# Altium PCB Stencil.PcbDoc (part 2 of 2)
Units mm, origin at the board's own origin, x right, y up, seen from the top; angles counter-clockwise.
Board outline 189.61 x 201.8 mm, 2 copper layers (Top Layer, Bottom Layer); 282 components, 0 nets, 889 pads, 215 vias.
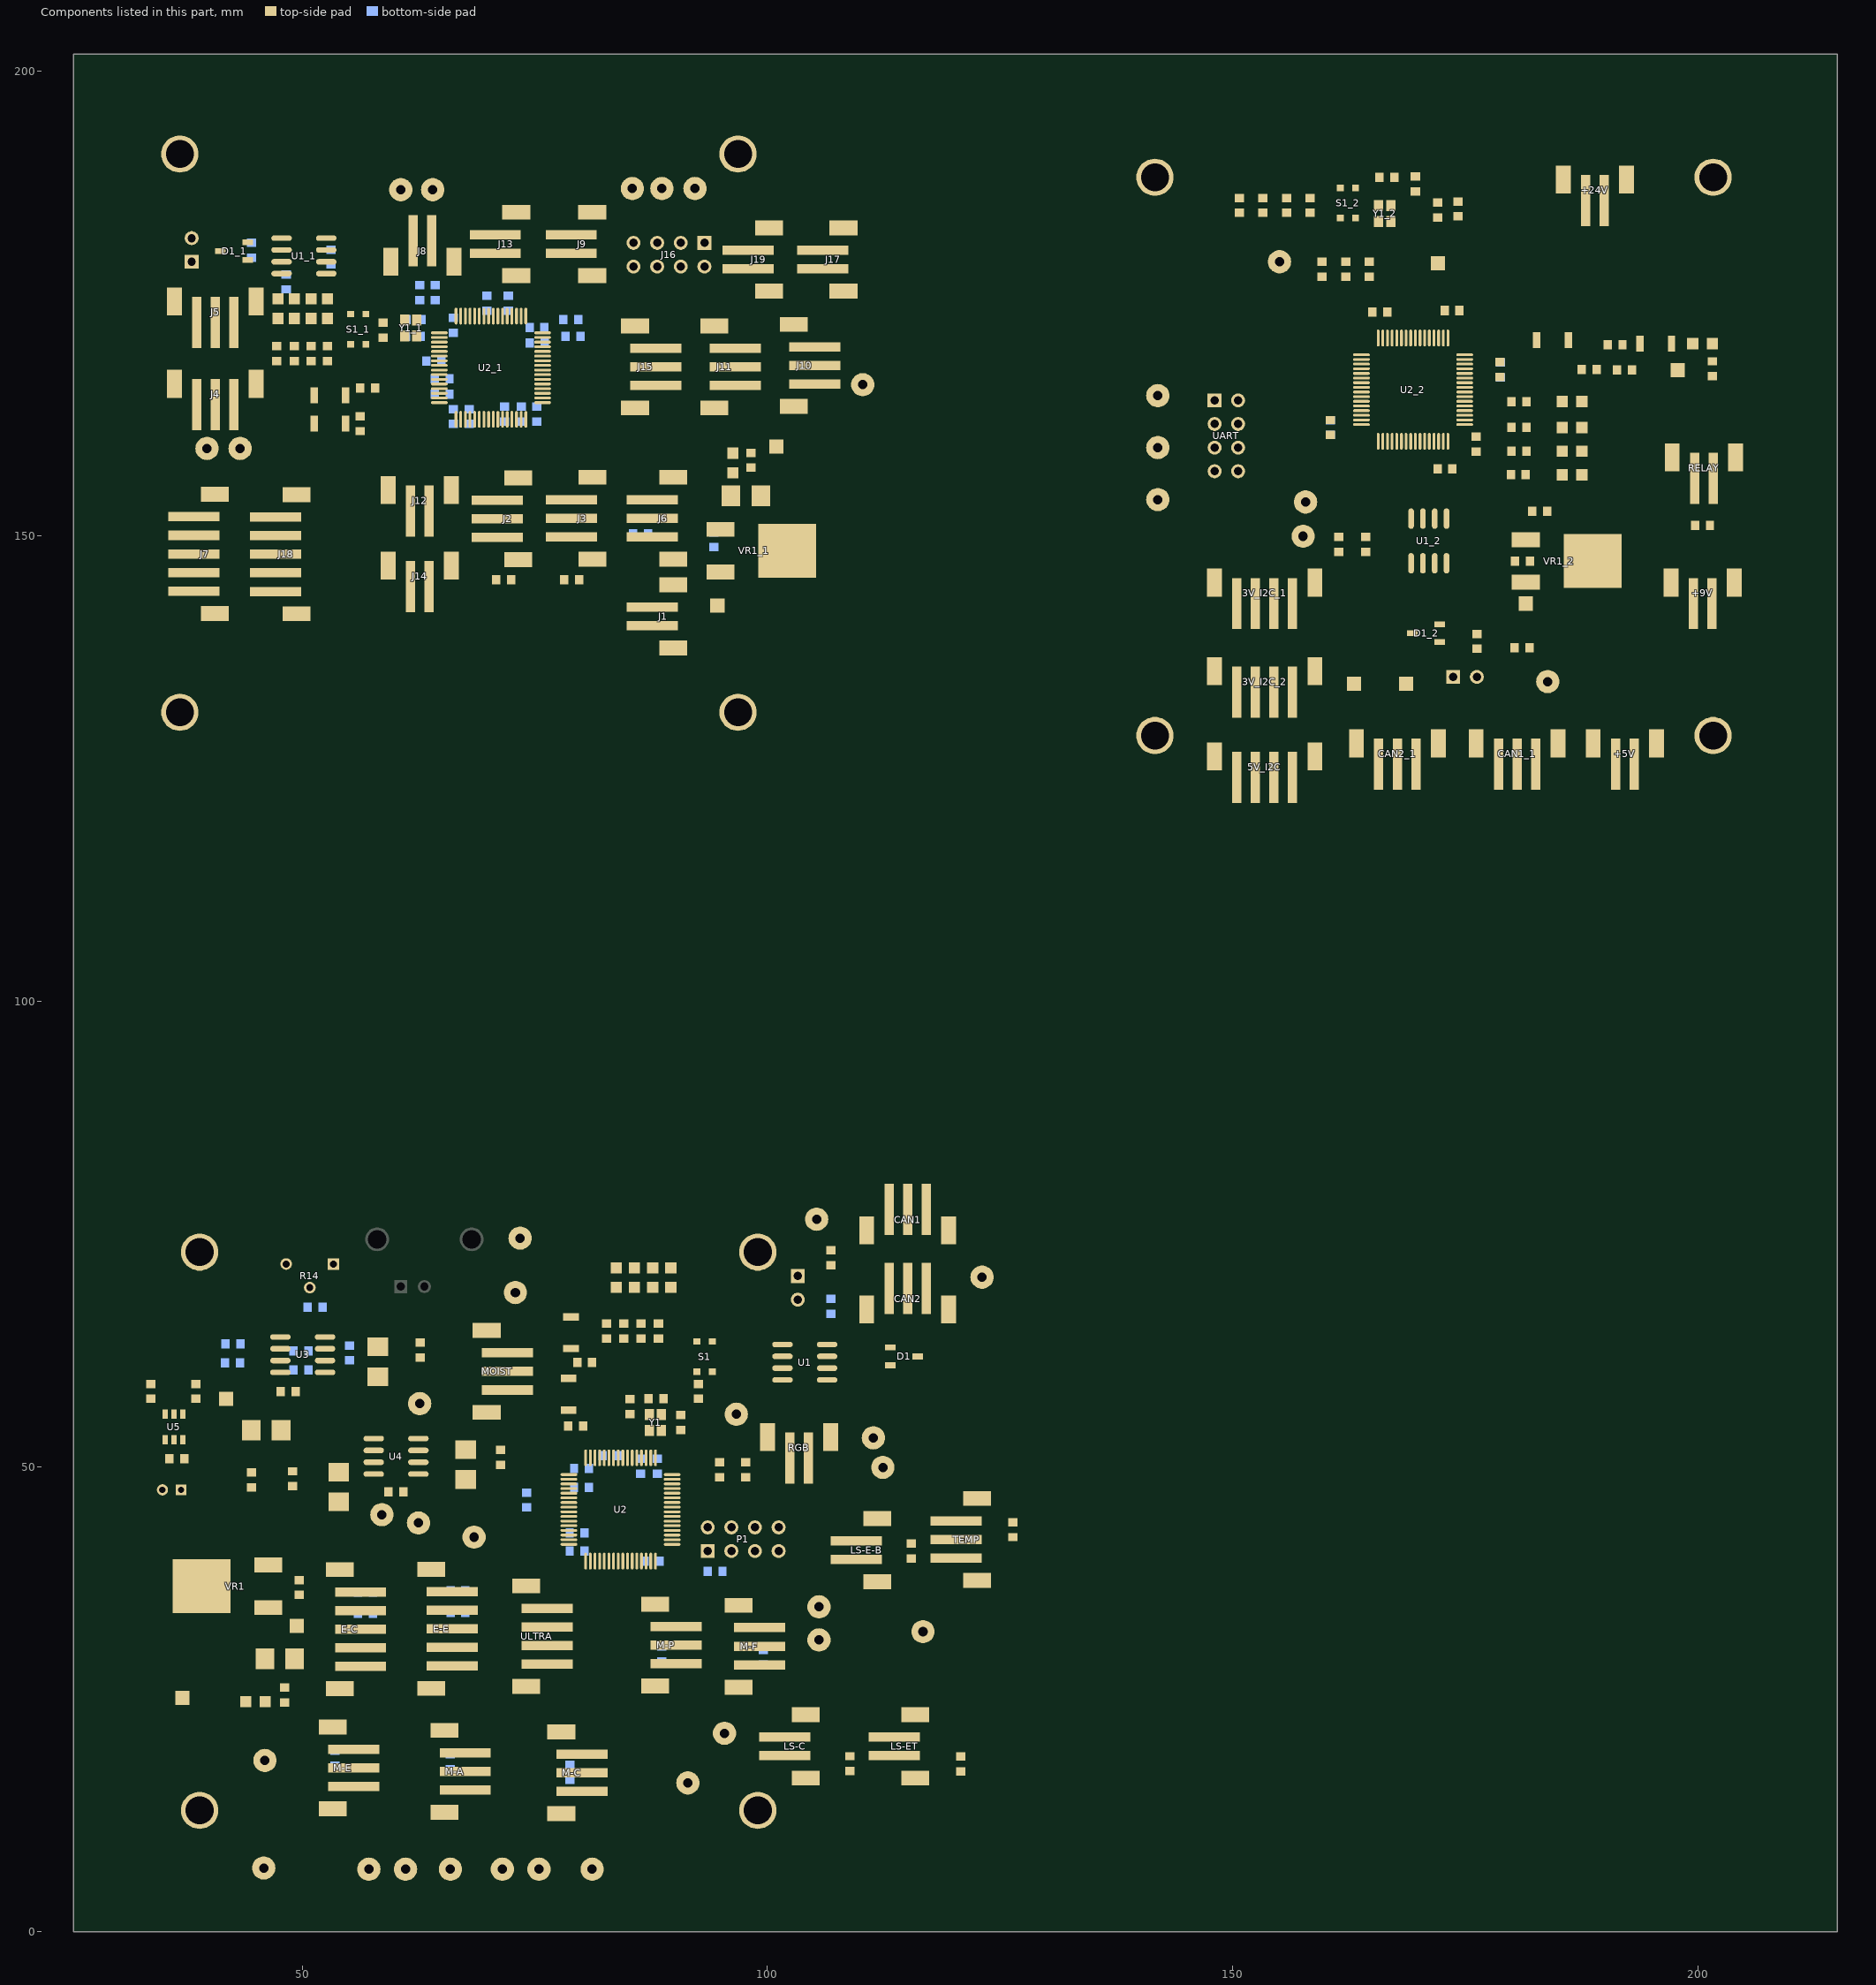
[diagram p2: the components of this part, seen from the top]

## Via types
v1: diameter 0.711, hole 0.406, Top Layer to Bottom Layer, 99 vias
v2: diameter 0.711, hole 0.406, Top Layer to Bottom Layer, tented both sides, 92 vias
v3: diameter 1.27, hole 0.711, Top Layer to Bottom Layer, 24 vias

## Nets (pads, with @x,y where several pads share a name; then routed paths per layer and width w, separated by ;. In a path a pad name is that pad's centre, name@x,y a point inside that pad or via, vN(x,y) a via of type N, cw(c..) or ccw(c..) an arc to the next point about the centre after c; other vN are vias at no path point)
pads on no net: 1.1 1.2 3V3.1 3V.1 3V_I2C_1.1 3V_I2C_1.2 3V_I2C_1.3 3V_I2C_1.4 3V_I2C_1.5 3V_I2C_1.6 3V_I2C_2.1 3V_I2C_2.2 3V_I2C_2.3 3V_I2C_2.4 3V_I2C_2.5 3V_I2C_2.6 5V.1 5V_I2C.1 5V_I2C.2 5V_I2C.3 5V_I2C.4 5V_I2C.5 5V_I2C.6 +5V.1 +5V.2 +5V.3 +5V.4 +9V.1 +9V.2 +9V.3 +9V.4 +24V.1 +24V.2 +24V.3 +24V.4 -5V.1 ?.0 C1.1 C1.2 C1_1.1 C1_1.2 C1_2.1 C1_2.2 C2.1 C2.2 C2_1.1 C2_1.2 C2_2.1 C2_2.2 C3.1 C3.2 C3_1.1 C3_1.2 C3_2.1 C3_2.2 C4.1 C4.2 C4_1.1 C4_1.2 C4_2.1 C4_2.2 C5.1 C5.2 C5_1.1 C5_1.2 C5_2.1 C5_2.2 C6.1 C6.2 C6_1.1 C6_1.2 C6_2.1 C6_2.2 C7.1 C7.2 C7_1.1 C7_1.2 C7_2.1 C7_2.2 C8.1 C8.2 C8_1.1 C8_1.2 C8_2.1 C8_2.2 C9.1 C9.2 C9_1.1 C9_1.2 C9_2.1 C9_2.2 C10.1 C10.2 C10_1.1 C10_1.2 C10_2.1 C10_2.2 C11.1 C11.2 C11_1.1 C11_1.2 C11_2.1 C11_2.2 C12.1 C12.2 C12_1.1 C12_1.2 C12_2.1 C12_2.2 C13.1 C13.2 C13_1.1 C13_1.2 C13_2.1 C13_2.2 C14.1 C14.2 C14_1.1 C14_1.2 C14_2.1 C14_2.2 C15.1 C15.2 C15_1.1 C15_1.2 C16.1 C16.2 C16_1.1 C16_1.2 C17.1 C17.2 C18.1 C18.2 C19.1 C19.2 C20.1 C20.2 C21.1 C21.2 C22.1 C22.2 C23.1 C23.2 C24.1 C24.2 C25.1 C25.2 C26.1 C26.2 C27.1 C27.2 CAN1.1 CAN1.2 CAN1.3 CAN1.4 CAN1.5 CAN1_1.1 CAN1_1.2 CAN1_1.3 CAN1_1.4 CAN1_1.5 CAN2.1 CAN2.2 CAN2.3 CAN2.4 CAN2.5 CAN2_1.1 CAN2_1.2 CAN2_1.3 CAN2_1.4 CAN2_1.5 CAN_H.1 CAN_L.1 CANH1.1 CANL1.1 D1.1 D1.2 D1.3 D1_1.1 D1_1.2 D1_1.3 D1_2.1 D1_2.2 D1_2.3 D2.1 D2.2 D2_1.1 D2_1.2 D2_2.1 D2_2.2 D3.1 D3.2 D3_1.1 D3_1.2 D3_2.1 D3_2.2 D4.1 D4.2 D4_1.1 D4_1.2 D4_2.1 D4_2.2 D5.1 D5.2 D5_1.1 D5_1.2 D5_2.1 D5_2.2 D6.1 D6.2 D6_1.1 D6_1.2 D6_2.1 D6_2.2 Designator16.0 Designator18.0 Designator19.0 E-C.1 E-C.2 E-C.3 E-C.4 E-C.5 E-C.6 E-C.7 E-E.1 E-E.2 E-E.3 E-E.4 E-E.5 E-E.6 E-E.7 EC1.1 EC2.1 ECI.1 EE1.1 EE2.1 EEI.1 GND.1 GND_1.1 H1.0 H2.0 H3.0 H4.0 I2C_SCL.1 I2C_SDA.1 J1.1 J1.2 J1.3 J1.4 J2.1 J2.2 J2.3 J2.4 J2.5 J3.1 J3.2 J3.3 J3.4 J3.5 J4.1 J4.2 J4.3 J4.4 J4.5 J5.1 J5.2 J5.3 J5.4 J5.5 J6.1 J6.2 J6.3 J6.4 J6.5 J7.1 J7.2 J7.3 J7.4 J7.5 J7.6 J7.7 J8.1 J8.2 J8.3 J8.4 J9.1 J9.2 J9.3 J9.4 J10.1 J10.2 J10.3 J10.4 J10.5 J11.1 J11.2 J11.3 J11.4 J11.5 J12.1 J12.2 J12.3 J12.4 J13.1 J13.2 J13.3 J13.4 J14.1 J14.2 J14.3 J14.4 J15.1 J15.2 J15.3 J15.4 J15.5 J16.1 J16.2 J16.3 J16.4 J16.5 J16.6 J16.7 J16.8 J17.1 J17.2 J17.3 J17.4 J18.1 J18.2 J18.3 J18.4 J18.5 J18.6 J18.7 J19.1 J19.2 J19.3 J19.4 J20.1 J20.2 JMP.1 JMP.2 LS-C.1 LS-C.2 LS-C.3 LS-C.4 LS-E-B.1 LS-E-B.2 LS-E-B.3 LS-E-B.4 LS-ET.1 LS-ET.2 LS-ET.3 LS-ET.4 M-A.1 M-A.2 M-A.3 M-A.4 M-A.5 M-C.1 M-C.2 M-C.3 M-C.4 M-C.5 M-E.1 M-E.2 M-E.3 M-E.4 M-E.5 M-F.1 M-F.2 M-F.3 M-F.4 M-F.5 M-P.1 M-P.2 M-P.3 M-P.4 M-P.5 MH1.0 MH2.0 MH3.0 MH4.0 MOIST-D.1 MOIST-P.1 MOIST.1 MOIST.2 MOIST.3 MOIST.4 MOIST.5 P1.1 P1.2 P1.3 P1.4 P1.5 P1.6 P1.7 P1.8 PH.1 POWER.1 POWER.2 PWMA.1 PWMC.1 PWME.1 PWMF.1 PWMP.1 R1.1 R1.2 R1_1.1 R1_1.2 R1_2.1 R1_2.2 R2.1 R2.2 R2_1.1 R2_1.2 R2_2.1 R2_2.2 R3.1 R3.2 R3_1.1 R3_1.2 R3_2.1 R3_2.2 R4.1 R4.2 R4_1.1 R4_1.2 R4_2.1 R4_2.2 R5.1 R5.2 R5_1.1 R5_1.2 R5_2.1 R5_2.2 R6.1 R6.2 R6_1.1 R6_1.2 R6_2.1 R6_2.2 R7.1 R7.2 R7_1.1 R7_1.2 R7_2.1 R7_2.2 R8.1 R8.2 R8_1.1 R8_1.2 R8_2.1 R8_2.2 R9.1 R9.2 R9_1.1 R9_1.2 R9_2.1 R9_2.2 R10.1 R10.2 R10_1.1 R10_1.2 R10_2.1 R10_2.2 R11.1 R11.2 R11_1.1 R11_1.2 R12.1 R12.2 R12_1.1 R12_1.2 R12_2.1 R12_2.2 R13.1 R13.2 R13_1.1 R13_1.2 R13_2.1 R13_2.2 R14.1 R14.2 R14.3 R14_1.1 R14_1.2 R14_2.1 R14_2.2 R15.1 R15.2 R15_1.1 R15_1.2 R15_2.1 R15_2.2 R16.1 R16.2 R16_1.1 R16_1.2 R16_2.1 R16_2.2 R17.1 R17.2 R17_1.1 R17_1.2 R18.1 R18.2 R19.1 R19.2 R19_1.1 R19_1.2 R20.1 R20.2 R20_1.1 R20_1.2 R21.1 R21.2 R21_1.1 R21_1.2 R22.1 R22.2 R22_1.1 R22_1.2 R23.1 R23.2 R23_1.1 R23_1.2 R24.1 R24.2 R24_1.1 R24_1.2 R25.1 R25.2 R26.1 R26.2 R27.1 R27.2 R28.1 R28.2 R29.1 R29.2 R30.1 R30.2 R31.1 R31.2 R32.1 R32.2 R33.1 R33.2 RELAY.1 RELAY.2 RELAY.3 RELAY.4 RGB.1 RGB.2 RGB.3 RGB.4 RT1.1 RT1.2 S1.1 S1.2 S1.3 S1.4 S1_1.1 S1_1.2 S1_1.3 S1_1.4 S1_2.1 S1_2.2 S1_2.3 S1_2.4 S2.1 S2.2 S2_1.1 S2_1.2 S2_2.1 S2_2.2 S3.1 S3.2 S3_1.1 S3_1.2 S3_2.1 S3_2.2 SCL.1 SDA.1 TEMP.1 TEMP.2 TEMP.3 TEMP.4 TEMP.5 TEMPT.1 THERM.1 TP1.1 TP2.1 TP3.1 TP4.1 TP5.1 TP6.1 TP7.1 TP8.1 TP9.1 TP10.1 U1.1 U1.2 U1.3 U1.4 U1.5 U1.6 U1.7 U1.8 U1_1.1 U1_1.2 U1_1.3 U1_1.4 U1_1.5 U1_1.6 U1_1.7 U1_1.8 U1_2.1 U1_2.2 U1_2.3 U1_2.4 U1_2.5 U1_2.6 U1_2.7 U1_2.8 U2.1 U2.2 U2.3 U2.4 U2.5 U2.6 U2.7 U2.8 U2.9 U2.10 U2.11 U2.12 U2.13 U2.14 U2.15 U2.16 U2.17 U2.18 U2.19 U2.20 U2.21 U2.22 U2.23 U2.24 U2.25 U2.26 U2.27 U2.28 U2.29 U2.30 U2.31 U2.32 U2.33 U2.34 U2.35 U2.36 U2.37 U2.38 U2.39 U2.40 U2.41 U2.42 U2.43 U2.44 U2.45 U2.46 U2.47 U2.48 U2.49 U2.50 U2.51 U2.52 U2.53 U2.54 U2.55 U2.56 U2.57 U2.58 U2.59 U2.60 U2.61 U2.62 U2.63 U2.64 U2_1.1 U2_1.2 U2_1.3 U2_1.4 U2_1.5 U2_1.6 U2_1.7 U2_1.8 U2_1.9 U2_1.10 U2_1.11 U2_1.12 U2_1.13 U2_1.14 U2_1.15 U2_1.16 U2_1.17 U2_1.18 U2_1.19 U2_1.20 U2_1.21 U2_1.22 U2_1.23 U2_1.24 U2_1.25 U2_1.26 U2_1.27 U2_1.28 U2_1.29 U2_1.30 U2_1.31 U2_1.32 U2_1.33 U2_1.34 U2_1.35 U2_1.36 U2_1.37 U2_1.38 U2_1.39 U2_1.40 U2_1.41 U2_1.42 U2_1.43 U2_1.44 U2_1.45 U2_1.46 U2_1.47 U2_1.48 U2_1.49 U2_1.50 U2_1.51 U2_1.52 U2_1.53 U2_1.54 U2_1.55 U2_1.56 U2_1.57 U2_1.58 U2_1.59 U2_1.60 U2_1.61 U2_1.62 U2_1.63 U2_1.64 U2_2.1 U2_2.2 U2_2.3 U2_2.4 U2_2.5 U2_2.6 U2_2.7 U2_2.8 U2_2.9 U2_2.10 U2_2.11 U2_2.12 U2_2.13 U2_2.14 U2_2.15 U2_2.16 U2_2.17 U2_2.18 U2_2.19 U2_2.20 U2_2.21 U2_2.22 U2_2.23 U2_2.24 U2_2.25 U2_2.26 U2_2.27 U2_2.28 U2_2.29 U2_2.30 U2_2.31 U2_2.32 U2_2.33 U2_2.34 U2_2.35 U2_2.36 U2_2.37 U2_2.38 U2_2.39 U2_2.40 U2_2.41 U2_2.42 U2_2.43 U2_2.44 U2_2.45 U2_2.46 U2_2.47 U2_2.48 U2_2.49 U2_2.50 U2_2.51 U2_2.52 U2_2.53 U2_2.54 U2_2.55 U2_2.56 U2_2.57 U2_2.58 U2_2.59 U2_2.60 U2_2.61 U2_2.62 U2_2.63 U2_2.64 U3.1 U3.2 U3.3 U3.4 U3.5 U3.6 U3.7 U3.8 U4.1 U4.2 U4.3 U4.4 U4.5 U4.6 U4.7 U4.8 U5.1 U5.2 U5.3 U5.4 U5.5 U5.6 U_RTS.1 U_RX.1 U_TX.1 UART.1 UART.2 UART.3 UART.4 UART.5 UART.6 UART.7 UART.8 UART_R.1 UART_RTS.1 UART_U.1 UE.1 ULTRA.1 ULTRA.2 ULTRA.3 ULTRA.4 ULTRA.5 ULTRA.6 UT.1 V_MNTR.1 VR1.1 VR1.2 VR1.3 VR1_1.1 VR1_1.2 VR1_1.3 VR1_2.1 VR1_2.3 VR1_2.4 Y1.1 Y1.2 Y1.3 Y1.4 Y1_1.1 Y1_1.2 Y1_1.3 Y1_1.4 Y1_2.1 Y1_2.2 Y1_2.3 Y1_2.4
copper on no net: | length 4796.4
  Top Layer w0.254: 35.714,50.849 35.714,51.573 36.133,51.992 36.133,52.925 ; 37.083,52.925 37.083,51.766 37.314,51.535 37.314,50.849 ; 38.1,179.483 38.1,177.578 40.64,175.038 40.64,172.955 ; 38.354,148.082 40.513,148.082 41.434,149.003 41.434,150.421 50.177,159.163 58.143,159.163 58.727,159.747 68.941,159.747 70.499,161.305 70.499,162.503 ; 38.354,150.082 40.449,150.082 50.038,159.671 57.924,159.671 58.457,160.204 68.752,160.204 69.999,161.452 69.999,162.503 ; 38.354,152.082 41.687,152.082 49.784,160.179 57.785,160.179 58.267,160.661 68.562,160.661 69.499,161.598 69.499,162.527 69.519,162.547 ; 40.64,159.29 40.64,164.116 40.64,172.955 ; v1(42.179,24.736) 43.908,24.736 ; 42.64,159.068 42.64,160.084 ; 43.307,159.417 42.64,160.084 ; v3@45.277,60.374 46.293,61.39 47.576,61.39 ; 45.72,7.112 45.72,13.794 v1(51.611,19.685) 51.683,19.613 55.507,19.613 ; 46.008,24.736 48.034,24.736 48.109,24.661 ; 46.351,34.848 49.478,34.848 v1(49.53,34.796) ; 46.351,39.418 47.193,39.418 48.805,37.806 49.657,37.806 ; 47.117,150.051 50.324,150.051 59.105,158.832 69.32,158.832 71.499,161.012 71.499,162.527 71.519,162.547 ; 47.117,152.051 51.677,152.051 58.916,159.29 69.13,159.29 70.999,161.158 70.999,162.527 71.019,162.547 ; 47.244,168.811 49.208,166.847 64.719,166.847 ; 47.244,170.411 47.244,173.26 47.371,173.387 ; 47.715,53.897 52.529,53.897 v3(53.85,52.576) 54.599,52.576 56.707,50.468 57.609,50.468 ; 47.765,178.213 v2(49.403,178.213) ; 47.765,179.483 47.572,179.676 v2(45.974,179.676) 44.147,179.676 42.64,178.169 42.64,172.955 42.64,164.116 42.64,160.084 ; 47.765,180.753 45.212,180.753 44.389,181.576 44.147,181.576 43.876,181.576 40.894,178.594 40.894,173.209 40.64,172.955 ; 48.998,58.088 50.611,58.088 56.961,51.738 57.671,51.738 58.674,51.738 59.487,50.925 59.487,47.039 ; 49.149,32.766 49.53,33.147 v1(49.53,34.796) ; 49.149,168.811 50.613,167.347 64.719,167.347 ; 49.149,170.411 49.149,173.387 ; 49.174,29.337 50.038,28.473 v1(50.038,26.543) ; 49.512,148.096 59.791,158.375 69.509,158.375 71.999,160.865 71.999,162.527 72.019,162.547 ; 49.657,36.206 49.657,34.923 v1(49.53,34.796) ; v2(50.84,180.753) 52.565,180.753 ; 50.927,168.811 51.891,167.847 64.719,167.847 ; 50.927,170.411 50.927,173.387 ; v1(51.76,15.613) 55.507,15.613 ; 52.438,61.39 54.167,61.39 55.056,60.501 v1(55.056,59.358) ; 52.565,178.213 55.291,175.487 66.821,175.487 67.499,174.809 67.499,173.647 67.519,173.647 ; 52.565,179.483 52.603,179.445 ; 52.565,182.023 53.975,182.023 59.846,176.152 66.802,176.152 67.999,174.955 67.999,173.667 68.019,173.647 ; 52.705,168.811 53.169,168.347 64.719,168.347 ; 52.705,170.411 52.705,173.387 ; 54.659,162.084 54.659,162.641 54.994,162.306 55.619,162.306 56.127,162.814 56.483,162.814 58.276,164.607 63.311,164.607 63.551,164.847 64.719,164.847 ; 54.659,165.132 54.659,165.622 55.951,165.622 56.223,165.894 57.053,165.064 63.051,165.064 63.334,165.347 64.719,165.347 ; 55.264,170.701 57.118,168.847 64.719,168.847 64.739,168.867 66.092,168.867 v2(66.167,168.942) ; 55.507,17.613 57.872,17.613 65.151,24.892 79.467,24.892 81.451,26.876 81.451,39.838 ; 56.007,36.656 56.007,42.672 58.039,44.704 58.293,44.704 ; 56.261,28.529 59.771,28.529 v1@59.817,28.575 ; 56.261,32.529 60.175,32.529 61.595,33.949 61.595,39.373 67.36,45.138 75.567,45.138 75.642,45.212 77.774,45.212 77.849,45.138 78.651,45.138 ; 56.261,34.529 60.027,34.529 60.921,35.422 60.921,42.607 63.983,45.669 78.619,45.669 78.651,45.638 ; 56.261,161.195 58.547,163.481 v2(64.643,163.481) ; 56.388,19.812 56.388,22.655 61.419,27.686 79.883,27.686 80.951,28.754 80.951,39.838 ; 56.832,173.869 57.08,174.117 v2(57.785,174.117) ; 57.823,165.894 57.87,165.847 64.719,165.847 65.861,165.847 66.83,164.878 v2(68.072,164.878) ; 57.912,36.529 v1@60.069,36.529 ; 58.104,60.133 58.356,59.88 59.436,60.96 v3(60.706,60.96) 61.904,60.96 62.676,61.733 ; 58.547,44.831 59.88,46.164 64.008,46.164 ; 58.674,171.317 60.644,169.347 64.719,169.347 ; 58.674,172.917 58.89,173.133 v2(59.944,173.133) 60.918,173.133 60.996,173.211 ; v2(59.944,171.482) 59.973,171.511 60.996,171.511 ; 60.579,187.23 61.894,185.915 61.894,181.733 ; 61.849,181.55 v2(61.849,178.213) 63.373,176.689 66.917,176.689 68.999,174.607 68.999,173.667 69.019,173.647 ; 62.23,56.642 60.871,55.283 60.871,47.293 61.542,46.622 64.389,46.622 ; 62.357,171.228 63.119,170.466 v2(63.119,170.212) 63.212,170.212 63.557,169.867 64.707,169.867 64.719,169.855 ; 62.471,50.468 63.578,50.468 64.389,49.657 64.389,46.622 ; v1@62.738,28.448 62.85,28.56 66.091,28.56 ; 63.373,146.209 63.627,146.463 63.627,148.495 67.157,152.025 67.157,153.778 67.862,154.482 67.862,154.5 72.804,159.442 72.822,159.442 73.254,159.874 73.254,159.892 73.569,160.207 v2(74.676,160.207) ; 63.627,152.686 63.627,155.988 65.557,157.918 70.256,157.918 v2(72.517,160.179) 72.517,161.116 72.999,161.598 72.999,162.527 73.019,162.547 ; v1(63.881,15.24) 63.883,15.242 67.509,15.242 ; v1@63.881,17.145 63.978,17.242 67.509,17.242 71.979,17.242 74.549,19.812 74.549,22.705 75.692,23.848 79.717,23.848 82.451,26.583 82.451,39.838 ; 63.881,46.138 78.651,46.138 ; 64.008,187.23 64.008,181.847 63.894,181.733 64.135,181.492 v2(64.135,178.213) 65.151,177.197 67.111,177.197 69.499,174.809 69.499,173.667 69.519,173.647 ; 64.389,46.609 64.389,46.622 ; 65.025,166.366 v2(67.111,166.366) ; 65.405,6.985 63.017,9.373 63.017,18.44 63.627,19.05 v1(63.881,19.05) 64.073,19.242 67.509,19.242 67.509,22.297 69.469,24.257 74.93,24.257 74.979,24.306 79.527,24.306 81.951,26.729 81.951,39.838 ; v2(65.786,161.571) 66.04,161.317 66.718,161.317 66.999,161.598 66.999,162.527 67.019,162.547 ; 66.091,32.56 70.23,32.56 71.247,33.577 71.247,39.268 75.616,43.638 78.651,43.638 ; 66.091,34.56 69.777,34.56 v1(69.81,34.593) 70.656,35.438 70.656,39.324 75.47,44.138 78.651,44.138 ; 66.519,173.647 65.157,173.647 v2(64.897,173.387) 64.719,173.209 64.719,171.847 64.719,171.827 65.668,171.827 68.072,169.423 v2(68.072,164.878) ; 67.019,173.647 67.019,172.281 v2(67.437,171.863) ; 67.502,48.614 68.061,48.055 v3(71.312,48.055) 71.312,50.176 ; 67.519,162.547 67.539,162.567 67.539,163.496 68.072,164.029 v2(68.072,164.878) ; 68.199,42.418 66.091,40.31 66.091,36.56 69.821,36.56 v1(69.85,36.531) 69.85,41.529 72.947,44.626 77.923,44.626 ; 69.723,60.325 67.056,62.992 67.056,67.945 73.279,74.168 ; 70.499,173.667 70.519,173.647 ; 70.499,173.895 70.499,175.104 69.85,175.754 v2(69.85,177.07) 70.231,177.451 70.231,179.896 70.739,180.404 ; 70.828,145.32 70.828,150.082 ; 70.942,149.863 71.167,149.638 73.152,149.638 75.863,152.349 75.863,158.953 77.47,160.56 77.47,164.338 76.981,164.827 76.287,164.827 76.327,164.867 ; 70.942,151.863 73.132,151.863 75.405,154.136 75.405,159.895 75.413,159.902 75.413,163.324 74.422,164.315 74.422,165.126 74.623,165.327 75.819,165.327 75.819,165.347 ; v2(70.993,175.8) 70.999,175.794 70.999,174.149 ; 71.519,173.647 71.539,173.667 71.539,174.809 73.604,176.874 76.893,176.874 79.248,179.229 83.312,179.229 85.598,181.515 85.598,187.23 85.471,187.357 ; v1@72.009,32.893 72.009,39.384 75.763,43.138 78.651,43.138 ; 72.06,60.224 74.318,60.224 75.184,59.358 75.184,47.672 75.727,47.13 77.851,47.13 ; v1(72.136,32.893) 73.787,32.893 ; 72.519,173.647 72.539,173.647 72.539,174.809 74.147,176.417 84.639,176.417 86.868,178.646 86.868,180.245 88.138,181.515 88.138,186.849 88.646,187.357 ; v1@72.771,28.829 72.834,28.766 76.327,28.766 ; 72.771,68.199 72.06,67.488 72.06,62.224 72.066,62.218 75.438,62.218 75.692,61.964 75.692,47.883 75.937,47.638 78.651,47.638 ; 73.039,174.022 73.039,174.596 73.32,174.877 74.218,174.877 74.991,174.104 80.937,174.104 81.915,175.082 85.844,175.082 89.269,178.507 89.269,180.106 90.678,181.515 90.678,185.833 92.202,187.357 ; v2(73.279,171.101) 73.525,171.347 75.819,171.347 ; 73.519,162.547 73.519,161.177 v2(73.66,161.036) ; v2(73.616,165.132) 73.616,164.232 74.019,163.829 74.019,162.547 ; 73.66,58.039 73.787,57.912 v1(73.787,56.515) ; 74.019,173.647 81.159,173.647 82.137,174.625 86.328,174.625 90.678,178.975 ; 75.164,164.827 75.184,164.847 75.819,164.847 75.819,164.827 ; v2(75.438,174.879) 81.066,174.879 81.726,175.539 81.908,175.539 81.915,175.546 84.709,175.546 88.138,178.975 ; v2(75.565,179.991) 78.789,179.991 78.903,180.105 ; 75.799,166.867 75.819,166.847 ; 75.819,6.985 73.787,9.017 73.787,16.637 v1(76.2,19.05) 76.236,19.086 80.082,19.086 80.082,23.567 82.951,26.436 82.951,39.838 ; 75.819,164.347 76.022,164.144 76.022,162.732 v2(76.454,162.3) ; 75.819,167.347 77.188,167.347 84.328,160.207 84.328,152.94 85.344,151.924 87.63,151.924 ; 75.819,167.847 75.839,167.867 82.228,167.867 85.09,165.005 99.441,165.005 102.783,168.347 105.08,168.347 ; 75.819,168.847 75.839,168.827 82.03,168.827 83.693,167.164 93.186,167.164 94.202,168.18 96.52,168.18 ; 75.819,169.347 84.558,169.347 85.725,168.18 88.011,168.18 ; 75.819,169.847 75.839,169.867 79.436,169.867 80.797,171.228 v2(81.369,171.228) 87.76,171.228 94.11,177.578 102.743,177.578 103.672,178.507 105.918,178.507 ; 75.819,170.347 75.839,170.367 79.289,170.367 81.928,173.006 v2(82.423,173.006) 83.127,173.71 89.588,173.71 94.615,178.737 97.917,178.737 ; 75.819,170.847 75.839,170.867 79.143,170.867 82.443,174.167 88.41,174.167 93.218,178.975 ; 75.819,171.847 76.438,171.847 v2(77.089,172.498) ; 75.946,166.367 75.986,166.327 ; 75.986,165.867 75.986,165.827 76.768,165.827 82.423,160.172 v2(82.423,158.02) ; 76.073,166.367 76.875,166.367 83.414,159.828 83.414,154.134 81.204,151.924 78.943,151.924 ; 76.295,30.734 76.327,30.766 79.851,30.766 v1(79.883,30.734) 79.883,42.227 79.472,42.638 78.651,42.638 ; 76.327,166.867 77.021,166.867 83.871,160.017 83.871,151.238 85.185,149.924 87.63,149.924 ; v1@76.454,14.986 76.554,15.086 80.082,15.086 ; v1(76.708,48.387) 76.835,48.514 77.211,48.138 78.651,48.138 ; v1@76.962,40.181 76.962,40.658 77.942,41.638 78.651,41.638 ; v1(76.962,41.705) 77.362,41.705 77.753,42.095 78.608,42.095 78.651,42.138 ; v1@77.343,49.911 77.343,49.022 77.727,48.638 78.651,48.638 ; 78.143,145.32 78.943,146.12 78.943,149.924 79.165,150.146 v2(82.423,150.146) ; 78.613,56.085 78.613,57.531 v1@78.74,57.658 ; 78.613,59.485 79.072,59.485 80.137,58.42 80.137,54.394 80.175,54.356 ; 78.651,46.638 78.635,46.622 64.389,46.622 ; 78.867,62.689 v1@78.867,64.389 ; 79.121,66.167 81.407,63.881 81.407,51.128 81.408,51.127 81.408,50.98 81.451,50.938 ; 80.082,17.086 82.364,17.086 83.439,18.161 83.439,26.289 ; 80.137,54.229 80.01,54.102 80.01,52.937 80.855,52.092 80.855,51.034 80.951,50.938 ; 81.951,50.938 81.951,48.986 v1(82.042,48.895) ; 82.451,50.938 82.451,49.756 v1@83.185,49.022 ; 82.689,63.768 82.042,63.121 82.042,53.352 82.408,52.985 82.408,52.974 82.908,52.474 82.908,50.696 82.931,50.673 ; 82.689,65.368 83.745,66.424 83.745,69.265 ; 83.439,50.927 83.439,52.601 82.55,53.49 82.55,61.766 84.552,63.768 ; 83.451,25.949 83.451,39.838 ; v1(83.693,73.66) 83.745,73.608 83.745,71.365 ; 83.947,51.054 83.896,51.105 83.896,52.791 83.058,53.629 83.058,60.411 86.414,63.768 ; 83.951,39.838 83.951,31.744 86.485,29.21 v1(86.487,29.21) 90.049,29.21 90.162,29.097 ; 84.43,51.689 84.43,52.93 83.566,53.794 83.566,59.057 88.277,63.768 ; 84.451,39.838 84.494,39.795 84.494,31.965 86.512,29.947 92.641,29.947 93.472,29.115 93.472,20.066 94.615,18.923 101.854,18.923 108.712,18.923 108.839,19.05 ; 84.552,65.368 85.725,66.541 85.725,69.241 85.7,69.265 ; 84.951,39.838 84.963,39.826 84.963,33.502 86.588,31.877 92.71,31.877 92.964,31.623 101.981,31.623 102.489,31.115 102.489,29.464 101.46,28.435 99.151,28.435 ; 84.951,50.938 84.951,51.743 84.963,51.755 84.963,53.303 84.074,54.192 84.074,57.658 85.471,59.055 92.416,59.055 ; 84.963,55.599 84.963,53.949 85.451,53.461 85.451,51.89 85.451,51.794 ; 84.963,57.199 85.052,57.288 87.211,57.288 87.211,55.684 87.298,55.597 ; v1@85.598,73.66 85.7,73.558 85.7,71.365 ; 85.951,39.838 85.951,37.481 86.882,36.551 99.314,36.551 103.505,32.36 103.505,26.797 111.125,19.177 ; 85.959,50.938 85.959,52.275 86.26,52.576 88.174,52.576 88.626,53.028 88.626,54.063 ; v1(86.106,54.102) 86.995,54.102 87.249,53.848 87.376,53.975 ; 86.414,65.368 87.656,66.609 87.656,69.265 ; 86.451,39.838 86.451,37.628 87.071,37.008 104.064,37.008 107.188,40.132 115.189,40.132 ; v1(86.741,41.529) 86.835,41.529 87.451,40.913 87.451,39.838 ; v1@86.792,33.077 86.812,33.097 90.162,33.097 ; 86.951,39.838 86.951,38.525 v1@87.503,37.973 ; v1@87.376,47.117 88.897,48.638 89.751,48.638 ; v1@87.503,73.66 v1(87.63,73.533) 87.656,73.507 87.656,71.365 ; 87.629,54.024 87.676,54.07 ; 87.951,39.838 v1(89.742,39.838) ; 88.277,65.368 89.611,66.702 89.611,69.265 ; 88.811,57.288 v1(90.797,57.288) ; 88.976,53.883 88.976,54.07 90.671,54.07 90.771,54.17 ; 89.611,71.365 89.611,73.482 v1(89.662,73.533) ; 89.751,41.638 89.769,41.656 90.551,41.656 92.414,39.793 99.121,39.793 99.949,40.622 99.949,41.656 98.652,42.953 98.652,43.464 ; 89.751,42.138 88.334,42.138 88.011,41.815 88.011,41.361 88.715,40.658 90.903,40.658 93.587,37.973 100.33,37.973 103.378,41.021 116.713,41.021 116.776,40.957 ; 89.751,42.638 91.601,42.638 92.184,42.055 94.981,42.055 96.112,40.924 ; 89.751,43.138 91.646,43.138 93.104,44.595 94.041,44.595 94.703,43.933 94.703,43.077 95.725,42.055 96.581,42.055 97.712,40.924 98.652,40.924 ; 89.751,44.138 91.999,44.138 92.914,45.052 98.663,45.052 100.061,43.655 100.061,42.19 101.092,41.16 ; 89.751,46.138 94.779,46.138 97.282,48.641 ; 89.751,46.638 92.612,46.638 94.488,48.514 ; 89.751,47.638 91.707,47.638 93.091,49.022 93.091,54.994 97.533,59.436 100.838,59.436 ; 89.751,48.138 89.794,48.095 91.059,48.095 92.456,49.492 92.456,55.372 100.203,63.119 101.181,63.119 ; 89.751,49.138 89.751,50.508 v1(90.043,50.8) ; 90.671,55.547 90.797,55.673 v1(90.797,57.288) ; 91.44,16.002 91.44,28.829 ; 92.402,60.193 92.402,59.069 92.416,59.055 ; 92.456,60.198 95.956,63.698 102.799,63.698 104.14,62.357 104.14,59.309 105.664,57.785 105.664,46.863 102.265,43.464 101.192,43.464 ; 92.583,57.288 v1(90.797,57.288) ; 92.583,58.888 92.416,59.055 ; 94.052,63.443 94.052,64.433 v1@94.056,64.438 ; 94.488,49.149 93.726,49.911 93.726,53.213 96.139,55.626 96.647,55.626 ; 94.869,48.857 95.669,49.657 102.362,49.657 ; 95.377,21.336 94.615,22.098 94.615,28.067 v1@95.377,28.829 ; v1(95.504,32.639) 95.554,32.689 99.151,32.689 ; v1(95.631,28.702) 95.644,28.689 99.151,28.689 ; 96.076,154.337 96.266,154.527 ; 96.302,158.947 98.203,158.947 ; 98.044,48.641 99.314,47.371 103.124,47.371 104.394,48.641 104.394,50.927 ; v1(98.298,21.082) 100.33,21.082 100.457,20.955 ; v1(99.187,60.833) 99.568,60.833 100.711,61.976 ; 101.092,40.767 101.092,41.16 ; 101.192,40.924 101.192,41.059 101.092,41.16 ; 103.251,67.691 103.886,67.691 106.807,70.612 106.807,71.628 ; 103.251,70.485 102.362,71.374 102.362,76.581 106.68,80.899 114.554,80.899 115.062,80.391 115.062,80.137 ; 104.902,76.581 104.965,76.644 ; v1(105.918,41.91) 109.22,41.91 109.347,42.037 ; v1@106.807,65.024 106.831,65 106.831,63.119 ; 106.807,73.228 106.807,74.803 104.965,76.644 ; 106.958,60.452 106.831,60.579 112.522,60.579 112.776,60.833 ; 107.188,61.722 111.887,61.722 112.964,62.799 113.206,62.799 ; 111.887,49.784 109.601,49.784 101.092,41.275 101.092,41.16 ; 112.903,77.978 106.299,77.978 104.965,76.644 ; 112.935,69.647 112.935,63.087 113.284,62.738 ; 113.062,69.139 113.062,77.648 ; 113.206,60.899 113.477,60.899 114.935,62.357 114.935,67.564 ; 113.614,18.923 120.777,18.923 120.904,18.796 ; 113.614,20.939 117.332,20.939 v1@117.316,20.955 ; 114.935,68.453 115.062,68.58 115.062,69.139 115.062,72.39 ; 115.062,77.648 115.062,72.39 ; 116.156,61.849 v1(117.856,61.849) ; 116.84,32.385 116.84,40.894 116.776,40.957 ; 117.062,69.139 117.062,70.707 117.094,70.739 v1(118.745,70.739) ; 117.062,77.648 117.062,79.343 117.094,79.375 v1(118.999,79.375) ; 120.009,40.048 123.487,40.048 123.489,40.051 ; 120.269,42.164 117.983,42.164 116.776,40.957 ; 122.174,42.418 126.365,42.418 ; 123.063,70.358 121.031,72.39 115.062,72.39 ; 141.958,153.924 143.736,153.924 146.784,156.972 148.054,156.972 148.054,155.575 149.197,154.432 153.642,154.432 156.817,157.607 167.358,157.607 168.14,158.389 168.14,160.185 ; 141.958,158.496 141.958,159.004 ; 141.958,159.512 148.054,159.512 149.197,158.369 149.197,155.575 149.578,155.194 153.515,155.194 156.436,158.115 166.45,158.115 167.131,158.797 167.131,160.176 167.14,160.185 ; 141.958,165.1 143.99,165.1 146.8,162.29 147.816,162.29 148.054,162.052 149.324,160.782 149.324,159.131 150.213,158.242 155.71,158.242 156.173,158.705 166.27,158.705 166.631,159.066 166.631,160.176 166.64,160.185 ; 150.309,124.079 150.309,133.191 150.277,133.223 150.277,142.589 150.436,142.748 150.436,148.686 151.737,149.987 157.579,149.987 157.668,149.898 161.389,149.898 161.643,149.898 161.643,149.907 170.64,158.904 170.64,160.185 ; 150.594,159.512 164.967,159.512 165.64,160.185 ; 150.594,162.052 153.514,162.052 156.209,164.747 161.881,164.747 162.61,164.019 162.61,163.286 162.902,162.994 163.831,162.994 163.84,162.985 ; 150.721,186.347 150.771,186.347 152.13,187.706 155.039,187.706 155.928,186.817 155.928,186.474 155.801,186.347 155.928,186.347 156.691,186.347 158.291,184.747 158.341,184.747 158.341,182.499 159.611,181.229 159.611,179.489 155.039,179.489 ; 152.309,124.079 152.309,133.191 152.277,133.223 152.277,142.589 152.436,142.748 152.436,148.019 v1(152.88,148.463) ; 157.833,153.67 159.865,155.702 v1(164.437,155.702) 166.586,155.702 170.131,159.247 170.131,160.176 170.14,160.185 ; 159.661,179.489 161.135,178.015 161.135,177.488 163.211,175.412 169.249,175.412 171.64,173.022 171.64,171.285 ; 160.627,160.744 160.665,160.782 ; 161.56,184.176 161.56,182.162 160.881,181.483 160.881,179.109 162.101,177.889 162.151,177.889 163.466,176.574 v1(163.466,176.403) ; v1(162.11,162.476) 162.114,162.481 163.836,162.481 163.84,162.485 ; 163.84,161.985 166.018,161.985 ; 164.31,149.898 166.304,149.898 v1(166.342,149.86) ; 165.034,174.079 165.034,172.758 165.64,172.152 165.64,171.285 165.64,170.247 ; v1(165.326,137.033) 163.591,137.033 163.04,136.482 163.04,134.112 163.04,133.096 167.7,128.436 167.7,125.476 167.782,125.558 ; 165.692,185.508 164.779,185.508 164.564,185.293 164.564,179.616 164.691,179.489 166.685,179.489 v1(167.612,178.562) ; 166.14,171.285 166.149,171.294 166.149,172.273 v1(166.723,172.847) 166.723,173.99 166.634,174.079 ; 166.992,183.808 167.334,184.15 167.971,184.15 168.12,184.299 168.12,187.792 167.396,188.516 167.396,188.566 169.577,188.566 169.644,188.633 ; v1(168.501,173.482) 170.533,173.482 171.14,172.875 171.14,171.285 ; v1(168.501,176.403) 169.129,176.403 172.05,179.324 172.05,184.239 172.177,184.366 174.216,184.366 ; 169.179,152.304 169.161,152.322 169.161,156.642 171.631,159.112 171.631,160.176 171.64,160.185 ; v1(169.636,184.176) 169.636,187.025 169.644,187.033 ; 170.449,146.654 170.449,143.939 172.262,142.126 172.262,140.523 172.262,140.467 172.953,140.467 173.708,139.712 173.708,134.874 173.708,133.604 174.851,132.461 179.169,132.461 180.577,131.053 180.577,125.476 ; v1(170.533,164.985) 174.94,164.985 ; 171.719,146.654 171.676,146.611 171.676,144.006 176.198,139.484 176.248,139.484 176.464,139.484 179.677,136.271 179.677,133.731 182.577,130.831 182.577,125.476 182.577,123.817 182.95,123.444 v1(185.21,123.444) ; 172.019,157.226 172.057,157.264 v1(172.057,158.496) 172.631,159.07 172.631,160.176 172.64,160.185 ; 172.14,169.201 172.14,171.285 172.14,172.88 172.819,173.559 172.819,174.206 172.781,174.244 ; 172.149,160.196 172.149,161.123 172.441,161.415 173.339,161.415 174.711,160.043 174.711,156.35 175.74,155.321 175.74,153.692 174.725,152.677 173.172,152.677 172.989,152.494 172.989,152.304 ; 172.262,138.369 172.262,137.746 168.628,134.112 168.628,129.54 169.7,128.468 169.7,125.476 169.7,123.563 170.073,123.19 v1(174.259,123.19) ; 172.62,160.909 172.631,160.92 ; 172.64,171.285 172.649,171.294 172.649,172.296 v1(173.2,172.847) 173.721,173.368 174.19,173.368 174.381,173.559 174.381,174.244 ; 172.714,167.985 174.94,167.985 176.723,167.985 177.14,168.402 v1(177.264,168.402) ; 172.989,146.654 173.021,146.622 173.021,144.304 v1(173.053,144.272) ; 173.14,160.185 173.14,159.064 173.619,158.585 173.619,157.226 ; 174.216,185.966 174.343,185.839 179.766,185.839 184.122,181.483 188.948,181.483 189.932,182.467 189.932,186.055 ; 174.94,163.985 174.949,163.976 175.878,163.976 176.343,163.511 176.343,163.074 177.619,161.798 v1(177.645,161.798) ; 174.94,164.485 174.949,164.476 176.024,164.476 177.645,162.856 v1(177.645,162.814) ; 174.94,165.485 174.949,165.476 176.025,165.476 178.407,163.094 178.407,157.353 179.169,156.591 179.899,156.591 ; 174.94,165.985 174.949,165.976 176.171,165.976 178.864,163.283 178.864,160.288 179.971,159.181 179.971,159.131 ; 174.94,166.485 176.309,166.485 179.971,162.823 179.971,161.671 ; 174.94,166.985 176.455,166.985 178.729,164.711 179.55,164.711 179.721,164.711 ; 174.94,167.485 177.165,167.485 v1(177.264,167.386) v1@177.518,167.386 ; 174.94,168.485 175.696,168.485 175.716,168.505 175.889,168.505 175.912,168.528 176.058,168.528 179.108,171.577 180.439,171.577 180.877,171.139 ; 174.94,168.985 175.869,168.985 180.112,173.228 192.319,173.228 193.774,171.773 193.774,171.323 ; 175.232,160.169 173.416,161.985 174.94,161.985 175.807,161.985 176.121,161.671 176.121,160.693 176.171,160.693 ; 176.248,134.874 176.248,137.884 ; v1(176.248,170.561) v1(176.248,173.609) ; 180.361,147.32 180.361,148.609 181.357,149.605 181.514,149.605 181.514,151.937 182.204,152.627 182.204,152.677 ; 181.499,156.591 185.402,156.591 ; 181.514,142.748 181.514,145.035 181.961,145.482 181.961,147.32 ; 181.533,159.131 185.398,159.131 ; 181.571,161.671 185.436,161.671 ; 181.571,164.461 185.402,164.461 ; 182.676,171.069 180.947,171.069 180.877,171.139 ; 187.513,167.894 182.414,167.894 180.877,169.431 180.877,171.139 ; v1(189.964,156.642) 189.964,166.491 191.323,167.85 ; 191.907,170.561 193.647,170.561 193.774,170.688 ; 197.824,167.85 197.838,167.836 ; 199.455,170.688 199.489,170.722 v1(199.489,172.085) ; 199.521,142.748 199.521,144.998 200.505,145.982 200.505,152.818 201.647,153.96 201.647,156.21 ; 199.647,156.21 199.647,151.188 199.705,151.13 ; 201.305,151.13 201.305,142.964 201.521,142.748 ; 201.502,167.132 201.555,167.185 ; 201.555,168.785 201.555,170.688
  Top Layer w0.381: 30.861,43.434 30.861,76.327 36.068,81.534 124.206,81.534 127.254,78.486 127.254,45.466 127.552,45.168 128.143,44.577 128.143,43.942 ; 33.72,58.888 35.991,58.888 v3(36.133,58.746) ; 35.183,52.925 35.183,55.825 33.72,57.288 32.577,58.431 32.577,62.279 34.101,63.803 45.596,63.803 46.468,64.674 48.851,64.674 50.865,62.66 52.438,62.66 57.431,62.66 58.104,63.333 62.676,63.333 64.797,63.333 67.502,60.628 67.502,51.814 ; 35.245,52.903 34.163,51.821 34.163,50.546 38.608,46.101 44.196,46.101 46.101,44.196 46.101,39.37 46.228,39.243 ; 36.26,55.802 36.133,55.675 v3(36.133,58.746) ; 37.084,25.146 37.084,29.21 37.211,29.337 ; 38.546,58.888 38.404,58.746 v3(36.133,58.746) ; 41.656,57.277 41.645,57.288 38.546,57.288 38.546,57.138 37.083,55.675 37.083,54.852 38.038,53.897 44.515,53.897 ; 42.672,30.353 42.765,30.26 45.051,30.26 45.085,30.226 ; 44.515,47.862 48.932,47.862 48.96,47.89 51.047,47.89 v3(51.181,47.756) 52.66,46.277 53.583,46.277 ; v3@45.404,62.66 47.576,62.66 ; 45.974,29.337 47.117,28.194 47.117,27.305 48.133,26.289 ; 47.576,60.12 47.576,58.266 47.398,58.088 46.42,58.088 44.515,56.183 44.515,53.897 ; 49.657,37.806 51.386,37.806 52.143,37.049 52.143,31.759 53.246,30.656 56.134,30.656 56.261,30.529 66.06,30.529 66.091,30.56 ; 53.659,49.401 49.176,49.401 48.96,49.617 48.805,49.462 44.515,49.462 44.515,53.897 ; 53.71,46.531 53.786,46.455 ; 53.85,49.591 54.243,49.198 57.609,49.198 ; 62.409,51.738 62.485,51.814 67.502,51.814 ; 71.312,51.776 71.274,51.814 67.564,51.814 67.502,51.814 ; v1@72.898,34.798 72.93,34.766 76.327,34.766 ; 76.457,81.28 76.543,61.214 ; v1(76.708,48.387) 76.543,48.552 76.543,54.356 ; 78.613,54.356 76.543,54.356 ; 79.553,61.214 76.543,61.214 ; v2(83.693,162.211) 98.393,162.211 100.965,159.639 100.965,156.337 ; v1@86.602,31.097 90.162,31.097 ; 87.951,50.938 89.778,50.938 v1@89.916,50.8 ; 90.162,30.816 90.244,30.734 98.679,30.734 99.06,30.353 ; v1@94.869,51.816 94.869,50.457 97.663,50.457 97.701,50.457 97.79,50.546 ; v1(94.869,51.943) 96.647,53.721 98.044,53.721 98.876,54.553 98.876,54.808 99.062,54.994 99.317,54.994 103.378,59.055 103.378,60.325 103.124,60.579 101.219,60.579 ; 108.839,17.145 108.839,16.002 110.617,14.224 118.618,14.224 120.777,16.383 120.777,17.145 ; 115.443,41.732 117.907,44.196 118.491,44.196 ; 120.777,17.399 120.777,17.145 ; 120.904,44.132 121.094,43.942 128.143,43.942 ; 148.054,164.592 148.054,166.116 149.07,167.132 159.357,167.132 162.659,170.434 164.41,170.434 165.934,168.91 166.304,168.91 ; 153.261,184.747 155.801,184.747 155.801,183.515 152.88,180.594 152.88,178.435 154.047,177.268 156.024,177.268 156.645,177.889 159.611,177.889 159.774,177.889 160.395,177.268 160.395,176.365 162.681,174.079 165.034,174.079 ; 154.277,133.223 154.277,142.589 154.436,142.748 154.436,146.59 156.055,148.209 161.3,148.209 161.389,148.298 162.24,148.298 162.786,148.844 162.786,150.114 163.853,151.181 166.926,151.181 167.9,150.207 169.577,150.207 170.449,151.079 170.449,151.879 170.449,152.824 172.12,154.495 ; 154.309,124.079 154.309,120.745 154.658,120.396 191.488,120.396 193.139,122.047 193.139,125.465 193.15,125.476 193.15,130.506 184.244,139.412 183.453,139.412 181.514,141.351 181.514,142.748 ; 160.665,160.782 v1(162.101,160.782) 162.681,160.782 163.84,161.941 ; 165.64,170.247 166.469,169.418 ; 166.018,161.985 166.339,162.306 ; v1(169.898,155.729) 170.56,155.067 171.549,155.067 172.12,154.495 ; 172.14,169.201 172.177,169.164 ; 172.565,162.485 172.709,162.485 ; 172.565,167.767 172.565,167.836 172.714,167.985 ; 173.021,161.994 173.407,161.994 173.416,161.985 ; 173.619,157.226 173.619,155.994 172.12,154.495 ; 175.232,160.169 175.232,156.718 177.772,154.178 ; v1(177.264,168.402) 177.556,168.694 178.729,168.694 180.162,168.694 181.856,167 188.269,167 189.113,167.844 189.113,167.894 189.113,169.037 ; 180.312,137.999 180.312,138.176 177.772,140.716 177.772,154.178 ; 184.503,153.543 182.979,155.067 178.661,155.067 177.772,154.178 ; 188.494,147.32 188.694,147.32 ; 190.307,170.511 190.257,170.561 189.583,170.561 189.113,170.091 189.113,169.037 ; 197.824,167.85 192.923,167.85 192.923,168.745 192.631,169.037 189.113,169.037 ; 197.838,167.836 199.801,167.836 200.505,167.132 201.502,167.132 ; 76.543,54.356 76.543,61.214 ; 120.777,17.145 124.714,17.145 128.143,20.574 128.143,43.942
  Top Layer w0.508: 38.354,144.082 38.385,144.051 47.117,144.051 47.118,144.05 46.863,143.795 v2(46.863,142.78) ; 38.354,146.082 38.385,146.051 47.117,146.051 49.18,146.051 55.023,140.208 84.963,140.208 85.122,140.367 87.63,140.367 92.456,140.367 94.615,142.526 94.615,145.823 94.941,146.149 94.643,146.149 ; 38.64,164.116 v2(38.64,168.434) 38.64,172.955 ; v2(40.005,180.626) 41.197,180.626 ; 47.371,175.487 49.149,175.487 ; v2(49.53,176.689) 49.149,176.308 49.149,175.487 ; v2(50.84,179.445) 52.527,179.445 52.565,179.483 ; 51.259,162.084 51.259,165.132 ; 52.705,175.487 50.927,175.487 49.149,175.487 ; v2(61.373,141.129) 61.373,144.579 61.627,144.833 61.627,152.686 61.722,152.781 v2(61.722,156.115) ; v2(70.485,155.226) 70.485,154.32 70.942,153.863 ; 70.739,182.404 70.866,182.277 v2(74.885,182.277) 78.903,182.277 ; 72.428,145.32 72.449,145.341 v2(73.66,145.341) ; v2(78.359,155.353) 78.359,154.508 78.943,153.924 ; 79.743,145.32 79.87,145.193 v2(80.899,145.193) ; v2(84.201,142.367) 87.63,142.367 ; v2(87.249,155.226) 87.249,154.305 87.63,153.924 ; 88.011,166.18 96.52,166.18 ; 88.011,170.18 v2(92.266,170.18) 96.52,170.18 104.913,170.18 105.08,170.347 ; v2(90.551,160.274) 91.837,158.988 91.837,148.955 v2(93.091,147.701) 94.643,146.149 ; 94.206,146.149 94.643,146.149 ; 94.615,150.393 94.941,150.719 ; 94.632,150.719 94.632,152.893 96.076,154.337 ; 96.266,154.527 96.266,156.811 ; 96.266,158.911 96.302,158.947 ; 98.12,180.737 98.231,180.626 v2(102.108,180.626) 106.68,180.626 ; 105.08,166.347 105.152,166.275 110.236,166.275 ; v1(150.721,182.88) 150.721,184.747 151.153,184.747 152.753,186.347 153.261,186.347 ; 156.309,124.079 156.277,124.111 156.277,142.589 156.436,142.748 156.436,142.055 156.809,141.682 v1(164.36,141.682) ; 158.391,186.347 158.341,186.347 158.341,188.185 158.722,188.566 162.801,188.566 163.21,188.157 ; 160.627,162.344 160.72,162.437 162.071,162.437 v1(162.11,162.476) ; 162.151,179.489 162.748,179.489 v1(166.088,176.149) ; 163.21,187.426 163.21,188.157 ; 164.31,148.298 164.36,148.298 ; 165.7,125.476 165.7,122.345 166.506,121.539 177.561,121.539 178.577,122.555 ; v1(165.961,192.659) 165.961,188.731 165.796,188.566 ; 166.992,185.508 166.992,186.421 165.796,187.617 165.796,188.566 ; 169.058,139.573 166.469,139.573 v1(164.36,141.682) ; 172.05,185.839 172.05,186.71 172.057,186.717 ; v1(172.057,189.865) 172.057,186.717 ; v1(174.508,154.305) 172.963,154.305 171.719,153.061 171.719,151.879 171.719,149.903 171.295,149.479 169.394,149.479 168.213,148.298 164.36,148.298 ; v1(176.171,157.48) 176.171,159.093 ; v1@177.518,167.386 177.81,167.094 178.729,167.094 ; 178.577,125.476 178.577,122.555 ; 181.357,149.605 179.676,149.605 179.042,148.971 179.042,141.986 181.912,139.116 181.912,137.999 181.937,138.024 183.804,138.024 183.868,137.96 183.868,134.366 185.773,134.366 191.15,128.989 191.15,125.476 191.15,122.555 190.134,121.539 179.593,121.539 178.577,122.555 ; 186.076,171.069 v1(187.981,171.069) ; 187.536,156.591 187.536,159.131 187.536,161.671 v1(187.536,163.066) 187.536,164.461 ; 187.932,186.055 187.932,182.753 187.678,182.499 185.265,182.499 180.338,187.426 172.766,187.426 172.057,186.717 ; v3(190.307,151.511) v3@190.368,151.572 ; 197.174,170.688 199.455,170.688 ; 163.21,188.157 163.619,188.566 165.796,188.566 ; v1(164.36,141.682) 164.36,148.298
  Bottom Layer w0.254: 38.1,182.023 38.608,181.515 44.511,181.515 ; 41.683,63.168 41.683,69.672 45.085,73.074 54.1,73.074 57.783,69.391 60.403,69.391 60.579,69.215 ; 43.283,63.168 43.283,61.136 44.007,61.136 v3(45.023,60.12) ; 44.511,179.915 44.75,179.676 v2(45.974,179.676) ; v3@45.277,62.406 49.049,62.406 49.049,70.979 48.26,71.769 ; 45.974,18.415 v1@59.944,32.385 ; 48.071,71.931 48.247,71.755 ; 48.26,178.124 48.349,178.213 v2(49.403,178.213) ; 49.049,60.374 49.049,58.647 49.657,58.039 v1(50.8,58.039) ; 50.546,60.579 50.649,60.682 50.649,62.406 ; 50.573,67.105 50.573,69.353 ; 50.649,60.374 51.693,61.418 55.056,61.418 v1(55.056,59.358) ; v1(51.611,19.685) 53.3,19.685 53.516,19.469 ; 53.151,71.931 55.056,70.026 55.056,63.181 55.118,63.119 ; 57.15,7.112 57.15,21.971 v1@69.723,34.544 ; 57.569,34.213 59.741,34.213 v1(60.121,34.593) ; 57.569,36.498 60.038,36.498 v1(60.071,36.531) ; v2(59.944,173.133) 61.072,173.133 61.189,173.25 ; 61.087,7.112 61.087,24.003 v1@69.723,32.639 ; 61.128,171.482 61.138,171.472 ; v2(61.849,178.213) 61.849,177.743 62.611,176.981 ; 62.799,171.189 63.119,170.869 v2@63.119,170.3 ; v1@64.046,19.088 65.913,19.088 ; v2(64.135,178.213) 64.135,177.362 64.389,177.108 ; 64.935,168.815 65.062,168.942 v2(66.167,168.942) 69.501,168.942 v2(75.438,174.879) ; 67.522,34.339 67.776,34.593 v1(69.81,34.593) ; 67.522,36.633 69.748,36.633 v1(69.85,36.531) ; 69.85,175.838 v2(69.85,177.07) ; v2(70.993,175.8) 72.098,175.8 72.136,175.838 75.565,179.267 v2(75.565,179.991) ; 71.501,6.858 71.501,32.258 v1(72.136,32.893) v1@72.263,33.02 ; 71.755,162.3 72.517,161.538 v2(72.517,160.179) ; 72.19,174.238 73.631,175.679 75.902,175.679 78.067,173.514 ; 74.118,47.204 74.118,45.77 74.168,45.72 ; v2(74.676,160.207) 75.327,160.858 75.327,162.3 v2(76.454,162.3) ; v1@76.327,19.05 77.441,17.936 78.753,17.936 ; 78.067,173.26 82.651,177.844 91.146,177.844 91.809,178.507 91.809,180.106 93.218,181.515 ; 78.735,40.943 78.735,42.794 ; 78.735,42.848 78.735,46.096 79.248,46.609 79.248,48.006 ; 79.227,49.805 80.73,51.308 82.169,51.308 ; 79.667,173.26 79.921,173.006 v2(82.423,173.006) ; v1(79.883,30.734) 81.153,29.464 81.153,6.731 ; 79.883,171.472 80.127,171.228 v2(81.369,171.228) ; v1(82.042,48.895) 82.291,49.144 82.291,51.164 83.071,51.943 85.09,51.943 86.233,50.8 86.36,50.8 ; v2(82.423,150.146) v2(82.423,158.02) ; v2(84.328,150.622) 84.709,150.241 85.56,150.241 ; 86.36,50.838 88.138,50.838 88.176,50.838 ; v1(86.487,29.21) 88.299,29.21 88.413,29.097 88.626,29.31 ; v1(87.757,37.846) 87.892,37.981 94.116,37.981 94.265,38.13 94.265,39.578 94.703,40.016 94.703,41.998 96.012,43.307 ; 88.265,50.927 88.176,50.838 ; v1@89.916,50.8 89.878,50.838 88.176,50.838 ; 93.561,40.913 93.572,40.924 ; v1@95.758,28.575 95.885,28.702 99.568,28.702 ; 96.112,40.924 96.112,40.54 105.537,31.115 ; 98.652,40.924 104.778,34.798 105.41,34.798 ; 101.122,43.464 101.192,43.464 ; v1(103.124,47.498) 104.14,47.498 109.347,52.705 111.252,52.705 ; v1(106.807,64.897) 106.807,66.421 ; 150.594,156.972 154.15,156.972 156.69,159.512 156.69,161.855 ; v1(152.88,148.463) 152.88,148.968 157.579,153.667 157.579,154.178 ; 156.655,161.89 156.69,161.855 ; 160.5,160.862 160.58,160.782 ; 160.5,162.462 160.514,162.476 ; v1(163.466,176.403) 156.69,169.627 156.69,161.855 ; v1(164.437,155.702) 165.147,154.992 173.758,154.992 174.087,155.321 188.643,155.321 v1(189.964,156.642) ; v1(165.326,137.033) 166.977,137.033 169.136,134.874 173.708,134.874 ; v1(166.342,149.86) 166.342,144.907 166.977,144.272 v1(173.053,144.272) v1@173.073,144.272 ; v1(167.612,178.562) 170.253,178.562 175.943,172.872 179.017,172.872 181.455,170.434 181.455,165.354 177.899,161.798 v1(177.645,161.798) ; v1(168.501,173.482) v1(168.501,176.403) ; v1(169.636,184.176) 169.636,182.507 176.248,175.895 v1(176.248,173.609) ; v1(170.533,164.985) 169.148,164.985 163.675,159.512 159.033,159.512 156.69,161.855 ; v1(174.259,123.19) 175.656,121.793 183.559,121.793 v1(185.21,123.444) ; v1(176.248,170.561) 179.38,170.561 180.439,169.502 180.439,165.481 177.772,162.814 v1(177.645,162.814)
  Bottom Layer w0.381: v2(50.84,180.753) 50.878,180.791 53.086,180.791 58.496,175.381 62.611,175.381 62.738,175.508 64.389,175.508 64.389,175.285 66.205,173.469 ; v1(52.038,34.213) 55.969,34.213 55.969,36.498 57.239,37.768 65.962,37.768 ; v2(64.643,163.481) 66.04,163.481 66.205,163.646 ; v2(64.897,173.387) 66.123,173.387 66.205,173.469 ; 65.824,166.91 65.824,165.259 66.205,164.878 66.205,163.646 ; 65.922,34.339 65.922,36.633 65.922,37.728 65.962,37.768 ; v2(68.072,164.878) 67.945,164.751 67.945,163.646 ; 72.19,174.238 72.136,174.238 69.85,174.238 66.974,174.238 66.205,173.469 ; v1(72.771,34.798) 82.55,34.798 86.106,31.242 ; v1@72.771,34.925 72.771,37.338 71.374,38.735 67.945,38.735 66.978,37.768 65.962,37.768 ; v2(73.616,165.132) 73.533,165.049 73.533,163.9 ; 76.06,170.764 76.06,172.453 76.105,172.498 v2(77.089,172.498) 77.305,172.498 78.067,173.26 ; v1(76.708,48.387) v1@76.824,48.387 ; v1@76.962,40.181 77.719,40.181 78.354,40.816 78.481,40.689 78.735,40.943 ; 78.067,173.514 78.067,173.26 ; 78.283,171.472 78.283,173.044 78.067,173.26 ; 78.867,40.64 78.867,39.243 79.629,38.481 87.035,38.481 88.392,39.838 v1(89.742,39.838) 90.972,38.608 93.472,38.608 ; 78.867,48.006 78.486,48.387 v1@76.824,48.387 ; 79.121,49.911 78.348,49.911 v1@76.824,48.387 ; v2(83.693,162.211) 78.073,162.211 76.384,163.9 75.184,163.9 73.533,163.9 ; v1(90.043,50.8) 91.059,51.816 v1@94.869,51.816 ; 93.561,38.735 93.561,40.913 ; 160.58,160.782 v1(162.101,160.782) ; v1(169.898,155.729) 169.898,158.159 170.406,158.667 v1(170.406,162.687) ; v1(177.264,168.402) 177.536,168.674 178.788,168.674 ; 66.205,163.646 67.945,163.646 ; 67.945,163.646 68.199,163.9 71.755,163.9 73.533,163.9
  Bottom Layer w0.508: 62.789,173.25 63.033,173.006 v2(63.881,173.006) ; v2(73.279,171.101) 73.616,170.764 74.46,170.764 ; 73.533,162.3 73.787,162.046 73.66,161.919 v2(73.66,161.036) ; v2(90.551,160.274) 90.551,168.465 v2(92.266,170.18) ; v2(93.091,147.701) 93.129,147.701 94.234,148.806 ; 160.514,162.476 v1(162.11,162.476) ; v1(177.264,167.386) 177.576,167.074 178.788,167.074
  other v1: 76.2,14.986 63.754,17.145 117.221,20.955 59.817,28.448 62.611,28.575 72.644,28.829 86.487,31.115 60.071,32.512 69.85,32.512 86.487,33.02 123.87,40.051 77.089,40.132 87.503,47.117 83.439,48.895 77.343,50.038 78.74,57.531 78.867,64.262 94.04,64.565 85.725,73.66
  other v2: 99.23,139.764 103.18,139.764 106.545,139.764 109.855,139.764 101.33,141.129 104.93,141.129 108.33,141.129 99.23,142.526 103.18,142.526 106.545,142.526 109.855,142.526 101.33,144.171 104.93,144.171 108.33,144.171 106.545,145.701 109.855,145.701 108.33,147.066 106.545,148.463 109.855,148.463 108.33,150.019 106.545,151.384 109.855,151.384 94.632,152.146 96.012,152.146 101.346,152.908 104.93,152.908 108.33,152.908 93.98,153.162 103.18,154.337 106.545,154.337 109.855,154.337 93.98,154.527 101.346,155.702 104.93,155.702 108.33,155.702 103.18,157.099 106.545,157.099 109.855,157.099 51.308,163.481 92.583,166.148
  other v3: 45.277,62.66 184.122,142.621 185.9,142.621 187.805,142.621 189.579,142.621 191.742,142.621 193.139,144.272 193.15,146.05 193.139,147.955 193.15,149.733 186.535,151.511 188.44,151.511 192.123,151.511 186.535,153.162 188.494,153.162 190.472,153.289 192.377,153.289

## Polygon pours and split planes (outlines as drawn)
no net on Bottom Layer "Bottom Layer-No Net 1" (solid, pour order 80): 206.855,121.539
no net on Bottom Layer "Bottom Layer-No Net 2" (solid, pour order 78): 183.225,153.416 184.249,154.44 184.249,154.51 193.002,154.51 194.663,152.849 194.663,143.256 192.702,141.295 192.702,141.224 183.256,141.224
no net on Bottom Layer "Bottom Layer-GND" (solid, pour order 76): 135.862,194.564 207.871,194.564 207.871,119.126 135.735,119.126
no net on Bottom Layer "GND" (solid, remove dead copper, pour order 66): 33.274,191.262 112.014,191.262 112.014,130.81 33.274,130.81
no net on Bottom Layer "Bottom Layer-+3V3" (solid, pour order 64): 97.803,158.086 97.55,157.833 97.55,138.872 111.175,138.872 111.265,138.782 111.265,158.086
no net on Bottom Layer "GND-No Net 1" (solid, pour order 54): 29.718,43.942
no net on Bottom Layer "GND-No Net" (solid, pour order 52): 28.975,28.751 28.975,3.048 129.667,3.048 129.667,83.048 76.327,83.048 76.327,48.062 78.759,48.062 78.949,47.871 78.949,46.385 78.759,46.195 57.342,46.195 55.851,44.704 43.584,44.704 43.584,28.751
no net on Bottom Layer "GND-+3V3" (solid, pour order 50): 29.083,44.831 29.21,44.704 29.21,28.702 43.561,28.702 43.561,44.831
no net on Bottom Layer "GND" (solid, pour order 48): 28.963,45.212 55.767,45.212 56.982,46.426 78.556,46.426 78.556,47.853 75.994,47.853 75.934,47.912 75.934,83.048 28.963,83.048
no net on Top Layer "Top Layer-+3V3" (solid, remove dead copper, pour order 74): 165.466,169.672 173.327,169.672 173.327,161.798 165.453,161.798
no net on Top Layer "Top Layer-No Net 1" (solid, pour order 72): 167.358,163.703
no net on Top Layer "Top Layer-No Net" (solid, pour order 70): 171.295,162.941
no net on Top Layer "NONET_L01_P068" (solid, pour order 68): 183.233,153.543 184.249,154.559 193.012,154.559 194.663,152.908 194.663,143.129 192.758,141.224 183.233,141.224
no net on Top Layer "top-3v3" (solid, pour order 62): 97.803,158.086 97.93,158.086 111.265,158.086 111.265,138.782 110.884,138.782 97.549,138.782
no net on Top Layer "gnd-top-vr" (solid, remove dead copper, pour order 60): 93.345,155.448 97.028,155.448 97.028,149.733 93.345,149.733
no net on Top Layer "gnd-top-vr" (solid, remove dead copper, pour order 58): 96.52,144.266 93.345,144.266 93.345,147.06 96.52,147.06
no net on Top Layer "3V3 top" (solid, pour order 56): 43.584,44.753 43.584,28.751 28.979,28.751 28.979,44.753

## Keep-outs
Keep-Out Layer:
  lines w1.2: 28.956,83.048 129.667,83.048 ; 32.004,127.508 113.538,127.508 113.538,195.072 32.004,195.326 32.004,127.508 ; 135.354,118.364 208.506,118.364 208.506,195.326 135.354,195.326 135.354,118.364

## Other copper
Top Layer:
  pour cut-out: 70.678,43.471
Bottom Layer:
  pour cut-out: 34.48,44.2
  pour cut-out: 39.306,43.579

## Silkscreen, mask and mechanical layers (free items; w line width, h text height)
Top Overlay:
  circle w0.25: c60.579,66.472 r0.125
  lines w0.2: 55.769,82.042 55.769,67.122 70.469,67.122 70.469,82.042
  text "A. Ebrahim" at 140.561,171.831 h1.02 r90
  text "SAFETY BOARD" at 138.148,171.704 h1.52 r90
  text "Arm Board rev 2.0" at 44.45,131.826 h1.52
  text "Mars Rover 2019" at 44.45,129.794 h1.27
  text "Science Board  / Rev. 1 / Adrianna Ascalon" at 105.41,5.588 h1.02
Mechanical 13:
  lines w0.1: 55.769,67.122 70.469,67.122 70.469,82.296 55.769,82.296 55.769,67.122
Mechanical 15:
  lines w0.05: 55.669,67.022 70.569,67.022 70.569,82.423 55.669,82.423 55.669,67.022
  lines w0.1: 62.619,74.422 63.619,74.422 ; 63.119,73.922 63.119,74.922

## Text inside footprints (layer, text, board x,y; h text height)
J16: Top Overlay "GND" at 85.09,177.197 h1.02 r270; Top Overlay "VCC" at 93.018,185.469 h1.02 r270; Top Overlay "RST" at 87.63,177.197 h1.02 r270; Top Overlay "CLK" at 90.17,177.197 h1.02 r270; Top Overlay "IO" at 92.964,177.038 h1.02 r270; Top Overlay "RTS" at 85.118,185.394 h1.02 r270; Top Overlay "RX" at 87.818,184.667 h1.02 r270; Top Overlay "TX" at 90.418,184.667 h1.02 r270
P1: Top Overlay "GND" at 93.872,45.37 h0.76 r90; Top Overlay "VCC" at 93.772,36.97 h0.76 r90; Top Overlay "RST" at 101.492,45.37 h0.76 r90; Top Overlay "CLK" at 98.972,45.27 h0.76 r90; Top Overlay "IO" at 96.372,45.37 h0.76 r90; Top Overlay "RTS" at 101.672,37.045 h0.76 r90; Top Overlay "RX" at 98.972,37.772 h0.76 r90; Top Overlay "TX" at 96.372,37.772 h0.76 r90
UART: Top Overlay "GND" at 152.5,164.292 h1.27; Top Overlay "VCC" at 144.1,164.392 h1.27; Top Overlay "RST" at 152.5,156.672 h1.27; Top Overlay "CLK" at 152.4,159.192 h1.27; Top Overlay "IO" at 152.5,161.792 h1.27; Top Overlay "RTS" at 144.175,156.492 h1.27; Top Overlay "RX" at 144.902,159.192 h1.27; Top Overlay "TX" at 144.902,161.792 h1.27